# EAGLE board eeZee_tiny (EAGLE 6.3)
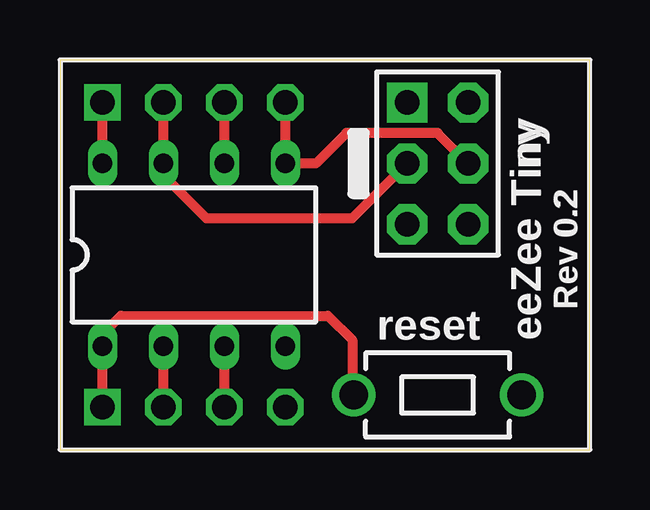
[diagram p0: board, top side]
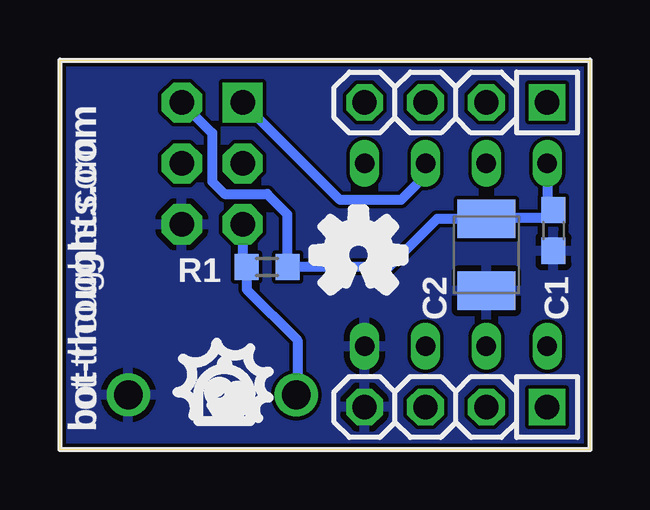
[diagram p1: board, bottom side, seen from below]

Size 22.1 x 16.26 mm. Coordinates in mm from the lower left corner, seen from the top.
Outline: 0,0 22.1,0 22.1,16.26 0,16.26 0,0
Copper layers (1*16): Top 0.0356mm / dielectric 1.5011mm / Bottom 0.0356mm
Design rules "default *": minimum track width 6mil, minimum drill 13mil, track to track 6mil, track to pad 6mil, pad to pad 6mil, via to via 6mil, smd to smd 6mil, copper to edge 10mil, drill to drill 6mil, minimum pad ring 7mil, minimum via ring 7mil, stop-mask expansion 4mil, vias tented up to drill 20mil, thermal gap 10mil

## Footprints (pad centres in the part's own frame; a part is rotated, then mirrored left to right if it is on the bottom)
C0603 = smd 1.1 x 1: 1 -0.85,0; 2 0.85,0
SMC_B = smd 1.6 x 2.4: + -1.5,0; - 1.5,0
DIL08 = drill 0.813 long: 1 -3.81,-3.81; 2 -1.27,-3.81; 3 1.27,-3.81; 4 3.81,-3.81; 5 3.81,3.81; 6 1.27,3.81; 7 -1.27,3.81; 8 -3.81,3.81
CON6P2R = drill 1.016 pad 1.676 square: 1 -2.54,-1.27 | drill 1.016 pad 1.676 octagon: 2 -2.54,1.27; 3 0,-1.27; 4 0,1.27; 5 2.54,-1.27; 6 2.54,1.27
1X04-S = drill 1.016 square: 1 -3.81,0 | drill 1.016 octagon: 2 -1.27,0; 3 1.27,0; 4 3.81,0
R0603 = smd 1 x 1.1: 1 -0.85,0; 2 0.85,0
6MMTACTILE_RECT = drill 1.2: P$1 -3.5,0; P$2 3.5,0

## Placement (x,y rotation side)
C1  0.1uF  [C0603]  1.52,9.14 270 bottom
C2  100uF  [SMC_B]  4.32,8.13 270 bottom
IC1  attiny  [DIL08]  5.59,8.13 0 top
J2  avrisp  [CON6P2R]  15.75,11.94 270 top
JP3  [1X04-S]  5.59,1.78 180 bottom
JP4  [1X04-S]  5.59,14.48 180 bottom
R1  10k  [R0603]  13.46,7.62 0 bottom
S1  reset  [6MMTACTILE_RECT]  15.75,2.29 0 top

## Library data of the parts
C1 = rcl; BOM: EXCLUDE; PARTNO: 0603YC104KAT2A
C2 = rcl; BOM: INCLUDE; PARTNO: F930J107MBA
IC1 = avr; PARTNO: A08-LC-TT-R
J2 = ads4
JP3 JP4 = pinhead-2
R1 = rcl; PARTNO: ERJ-3GEYJ103V
S1 = mes_electromech

## Nets
!RESET: IC1.1 J2.5 JP3.1 R1.1 S1.P$1
GND: C1.2 C2.- IC1.4 J2.6 JP3.4 S1.P$2
MISO: IC1.6 J2.1 JP4.3
MOSI: IC1.5 J2.4 JP4.4
N$2: IC1.2 JP3.2
N$8: IC1.3 JP3.3
SCK: IC1.7 J2.3 JP4.2
VCC: C1.1 C2.+ IC1.8 J2.2 JP4.1 R1.2

## Tracks (layer width: path | path; a pad name or v marks a point on that pad's centre or on a via)
!RESET
  Top 0.406: JP3.1 IC1.1 1.78,4.83 2.54,5.59 11.18,5.59 12.19,4.57 12.19,2.34 S1.P$1
  Bottom 0.406: J2.5 14.48,7.79 R1.1 14.31,6.69 12.19,4.57 12.19,2.34 S1.P$1
GND
  pour Bottom: 0,16.26 22.1,16.26 22.1,0 0,0
MISO
  Top 0.406: IC1.6 JP4.3
  Bottom 0.406: IC1.6 6.86,11.43 7.87,10.41 10.41,10.41 J2.1
MOSI
  Top 0.406: JP4.4 IC1.5 10.67,11.94 11.94,13.21 15.75,13.21 J2.4
N$2
  Top 0.406: JP3.2 IC1.2
N$8
  Top 0.406: JP3.3 IC1.3
SCK
  Top 0.406: JP4.2 IC1.7 4.32,11.43 6.1,9.65 12.19,9.65 J2.3
VCC
  Top 0.406: IC1.8 JP4.1
  Bottom 0.406: IC1.8 1.78,9.74 C1.1 1.52,9.65 4.29,9.65 C2.+ 6.37,9.63 8.38,7.62 R1.2 12.61,9.82 13.46,10.67 15.24,10.67 15.75,11.18 15.75,13.21 J2.2

## Text on the board
tNames: Rev 0.2 | eeZee Tiny
bNames: bot-thoughts.com
_tsilk: Rev 0.2 | reset | eeZee Tiny
_bsilk: R1 | C1 | C2 | bot-thoughts.com